# Altium PCB AVR最小系统板.PcbDoc (part 2 of 3)
Units mm, origin at the board's own origin, x right, y up, seen from the top; angles counter-clockwise.
Board outline 152.4 x 101.6 mm, 2 copper layers (Top Layer, Bottom Layer); 29 components, 54 nets, 170 pads, 0 vias.
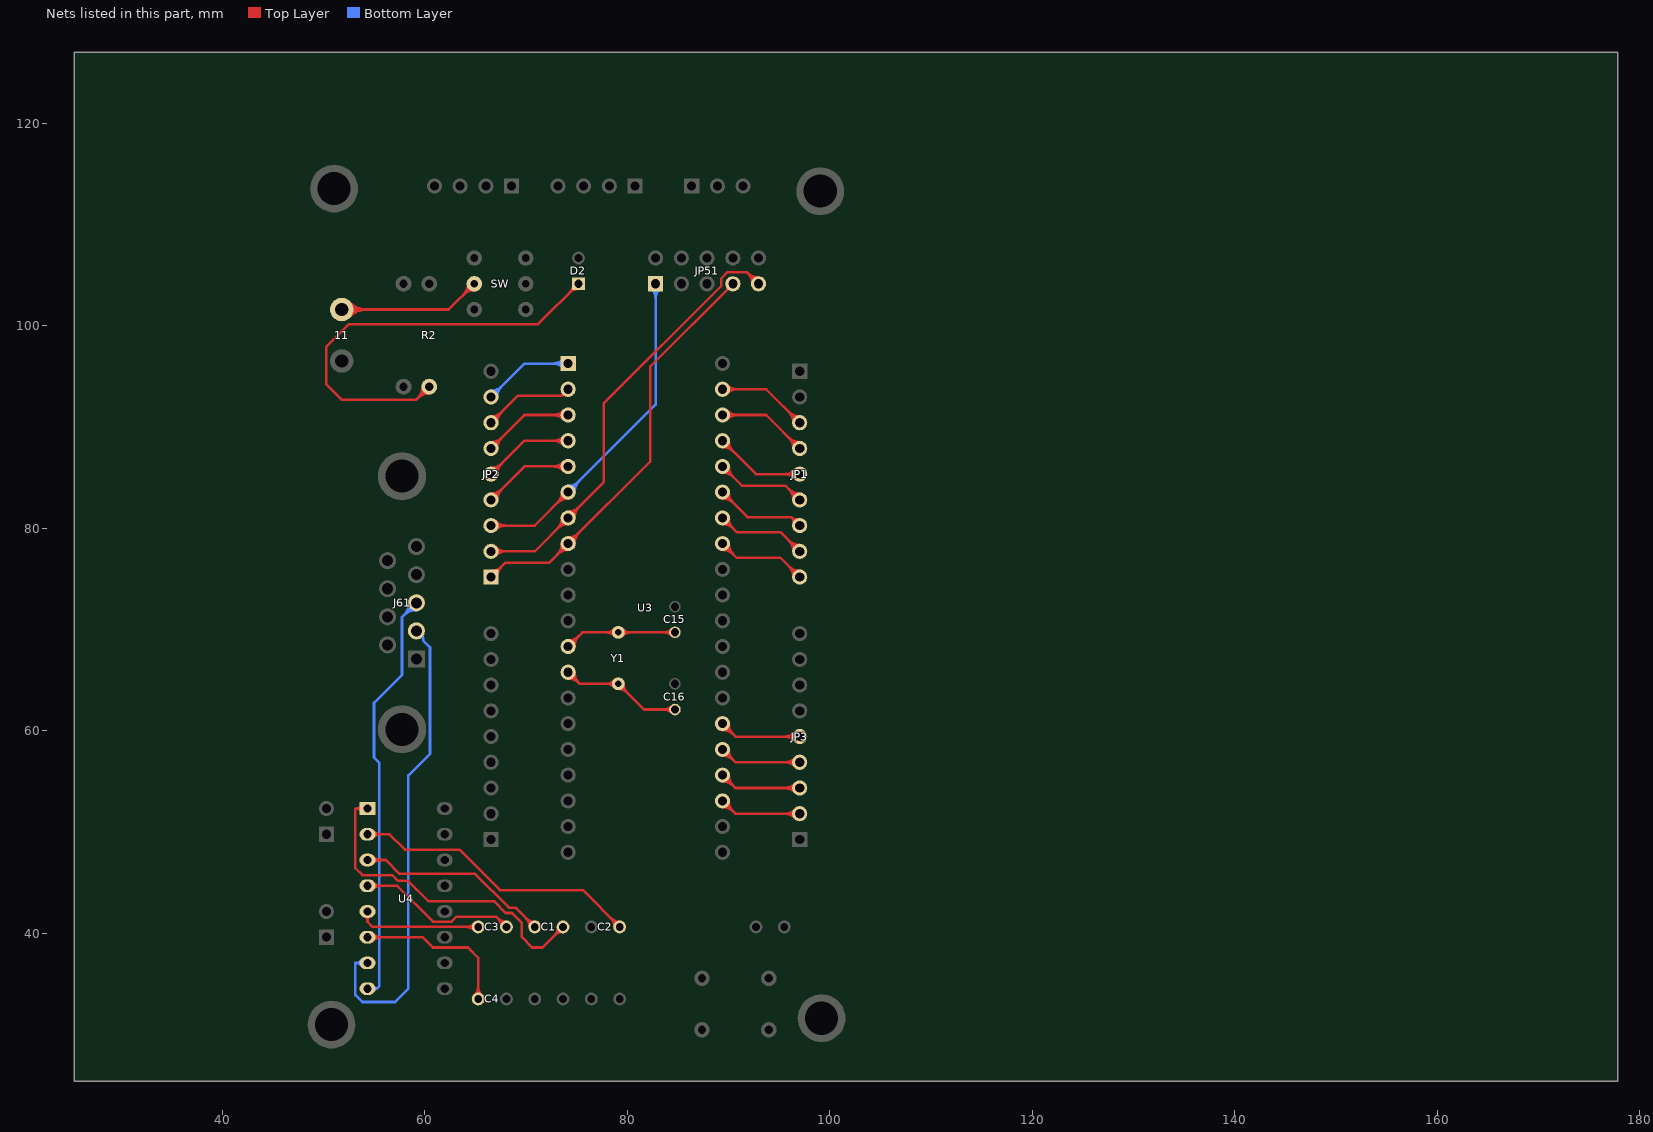
[diagram p2: the nets of this part, all layers, seen from the top]

## Nets (pads, with @x,y where several pads share a name; then routed paths per layer and width w, separated by ;. In a path a pad name is that pad's centre, name@x,y a point inside that pad or via, vN(x,y) a via of type N, cw(c..) or ccw(c..) an arc to the next point about the centre after c; other vN are vias at no path point) (continued)
Net11_1: "11.VCC +5V" SW.1 | length 52.3
  Top Layer w0.254: 51.816,101.6 62.357,101.6 SW.1@64.897,104.14 ; 52.187,101.229 cw(c53.083,100.333) 53.083,101.6 ; 52.187,101.229 cw(c53.083,100.333) 53.083,101.6 ; 52.187,101.229 cw(c53.083,100.333) 53.083,101.6 ; 52.187,101.971 ccw(c53.083,102.867) 53.083,101.6 ; 52.187,101.971 ccw(c53.083,102.867) 53.083,101.6 ; 52.187,101.971 ccw(c53.083,102.867) 53.083,101.6 ; 52.367,101.049 cw(c53.697,99.719) 53.697,101.6 ; 52.367,101.049 cw(c53.697,99.719) 53.697,101.6 ; 52.367,101.049 cw(c53.697,99.719) 53.697,101.6 ; 52.367,102.151 ccw(c53.697,103.481) 53.697,101.6 ; 52.367,102.151 ccw(c53.697,103.481) 53.697,101.6 ; 52.367,102.151 ccw(c53.697,103.481) 53.697,101.6 ; 52.546,100.87 cw(c54.31,99.106) 54.31,101.6 ; 52.546,100.87 cw(c54.31,99.106) 54.31,101.6 ; 52.546,100.87 cw(c54.31,99.106) 54.31,101.6 ; 52.546,102.33 ccw(c54.31,104.094) 54.31,101.6 ; 52.546,102.33 ccw(c54.31,104.094) 54.31,101.6 ; 52.546,102.33 ccw(c54.31,104.094) 54.31,101.6 ; 63.813,103.056 cw(c64.897,101.972) SW.1@64.897,103.505 ; 63.813,103.056 ccw(c62.729,104.14) SW.1@64.262,104.14 ; 63.813,103.056 cw(c64.897,101.972) SW.1@64.897,103.505 ; 63.813,103.056 ccw(c62.729,104.14) SW.1@64.262,104.14 ; 63.813,103.056 cw(c64.897,101.972) SW.1@64.897,103.505 ; 63.813,103.056 ccw(c62.729,104.14) SW.1@64.262,104.14 ; 64.247,103.49 cw(c64.897,102.839) SW.1@64.897,103.759 ; 64.247,103.49 ccw(c63.596,104.14) SW.1@64.516,104.14 ; 64.247,103.49 cw(c64.897,102.839) SW.1@64.897,103.759 ; 64.247,103.49 ccw(c63.596,104.14) SW.1@64.516,104.14 ; 64.247,103.49 cw(c64.897,102.839) SW.1@64.897,103.759 ; 64.247,103.49 ccw(c63.596,104.14) SW.1@64.516,104.14
NetC1_1: C1.1 U4.1 | length 42.7
  Top Layer w0.254: U4.1@54.352,52.323 53.162,52.323 ; C1.1@73.66,40.64 71.628,38.608 70.612,38.608 69.596,39.624 69.596,41.021 68.605,42.012 67.996,42.012 66.827,43.18 60.35,43.18 58.318,45.212 57.328,45.212 56.794,45.745 53.848,45.745 53.162,46.431 53.162,52.323 ; 53.162,52.323 cw(c53.162,51.512) U4.1@53.799,52.014 ; 53.162,52.323 ccw(c53.162,53.134) U4.1@53.799,52.632 ; 53.162,52.323 cw(c53.162,51.512) U4.1@53.799,52.014 ; 53.162,52.323 ccw(c53.162,53.134) U4.1@53.799,52.632 ; 53.162,52.323 cw(c53.162,51.512) U4.1@53.799,52.014 ; 53.162,52.323 ccw(c53.162,53.134) U4.1@53.799,52.632 ; 72.793,39.773 cw(c73.66,38.906) C1.1@73.66,40.132 ; 72.793,39.773 ccw(c71.926,40.64) C1.1@73.152,40.64 ; 72.793,39.773 cw(c73.66,38.906) C1.1@73.66,40.132 ; 72.793,39.773 ccw(c71.926,40.64) C1.1@73.152,40.64 ; 72.793,39.773 cw(c73.66,38.906) C1.1@73.66,40.132 ; 72.793,39.773 ccw(c71.926,40.64) C1.1@73.152,40.64
NetC1_2: C1.2 U4.3 | length 30.7
  Top Layer w0.254: U4.3@54.352,47.243 56.16,47.243 57.531,45.872 64.973,45.872 68.303,42.543 68.963,42.543 C1.2@70.866,40.64 ; U4.3@54.867,46.891 cw(c55.717,46.041) 55.717,47.243 ; U4.3@54.867,46.891 cw(c55.717,46.041) 55.717,47.243 ; U4.3@54.867,46.891 cw(c55.717,46.041) 55.717,47.243 ; U4.3@54.867,47.595 ccw(c55.717,48.445) 55.717,47.243 ; U4.3@54.867,47.595 ccw(c55.717,48.445) 55.717,47.243 ; U4.3@54.867,47.595 ccw(c55.717,48.445) 55.717,47.243 ; 69.999,41.507 cw(c69.132,40.64) C1.2@70.358,40.64 ; 69.999,41.507 ccw(c70.866,42.374) C1.2@70.866,41.148 ; 69.999,41.507 cw(c69.132,40.64) C1.2@70.358,40.64 ; 69.999,41.507 ccw(c70.866,42.374) C1.2@70.866,41.148 ; 69.999,41.507 cw(c69.132,40.64) C1.2@70.358,40.64 ; 69.999,41.507 ccw(c70.866,42.374) C1.2@70.866,41.148
NetC2_1: C2.1 U4.2 | length 40.1
  Top Layer w0.254: U4.2@54.352,49.783 56.516,49.783 58.039,48.26 63.449,48.26 67.437,44.272 75.616,44.272 C2.1@79.248,40.64 ; U4.2@54.867,49.431 cw(c55.717,48.581) 55.717,49.783 ; U4.2@54.867,49.431 cw(c55.717,48.581) 55.717,49.783 ; U4.2@54.867,49.431 cw(c55.717,48.581) 55.717,49.783 ; U4.2@54.867,50.135 ccw(c55.717,50.985) 55.717,49.783 ; U4.2@54.867,50.135 ccw(c55.717,50.985) 55.717,49.783 ; U4.2@54.867,50.135 ccw(c55.717,50.985) 55.717,49.783 ; 78.381,41.507 cw(c77.514,40.64) C2.1@78.74,40.64 ; 78.381,41.507 ccw(c79.248,42.374) C2.1@79.248,41.148 ; 78.381,41.507 cw(c77.514,40.64) C2.1@78.74,40.64 ; 78.381,41.507 ccw(c79.248,42.374) C2.1@79.248,41.148 ; 78.381,41.507 cw(c77.514,40.64) C2.1@78.74,40.64 ; 78.381,41.507 ccw(c79.248,42.374) C2.1@79.248,41.148
NetC3_1: C3.1 U4.4 | length 27.3
  Top Layer w0.254: U4.4@54.352,44.703 57.262,44.703 60.808,41.157 62.645,41.157 63.144,41.656 67.056,41.656 C3.1@68.072,40.64 ; U4.4@54.867,44.351 cw(c55.717,43.501) 55.717,44.703 ; U4.4@54.867,44.351 cw(c55.717,43.501) 55.717,44.703 ; U4.4@54.867,44.351 cw(c55.717,43.501) 55.717,44.703 ; U4.4@54.867,45.055 ccw(c55.717,45.905) 55.717,44.703 ; U4.4@54.867,45.055 ccw(c55.717,45.905) 55.717,44.703 ; U4.4@54.867,45.055 ccw(c55.717,45.905) 55.717,44.703 ; 67.205,41.507 cw(c66.338,40.64) C3.1@67.564,40.64 ; 67.205,41.507 ccw(c68.072,42.374) C3.1@68.072,41.148 ; 67.205,41.507 cw(c66.338,40.64) C3.1@67.564,40.64 ; 67.205,41.507 ccw(c68.072,42.374) C3.1@68.072,41.148 ; 67.205,41.507 cw(c66.338,40.64) C3.1@67.564,40.64 ; 67.205,41.507 ccw(c68.072,42.374) C3.1@68.072,41.148
NetC3_2: C3.2 U4.5 | length 22.2
  Top Layer w0.254: U4.5@54.352,42.163 54.352,41.148 ; C3.2@65.278,40.64 54.86,40.64 54.352,41.148 ; U4.5@54.047,41.769 cw(c53.567,41.148) 54.352,41.148 ; U4.5@54.047,41.769 cw(c53.567,41.148) 54.352,41.148 ; U4.5@54.047,41.769 cw(c53.567,41.148) 54.352,41.148 ; 54.352,41.148 cw(c55.138,41.148) U4.5@54.657,41.769 ; 54.352,41.148 cw(c55.138,41.148) U4.5@54.657,41.769 ; 54.352,41.148 cw(c55.138,41.148) U4.5@54.657,41.769 ; 64.052,40.64 cw(c64.052,39.414) C3.2@64.919,40.281 ; 64.052,40.64 ccw(c64.052,41.866) C3.2@64.919,40.999 ; 64.052,40.64 cw(c64.052,39.414) C3.2@64.919,40.281 ; 64.052,40.64 ccw(c64.052,41.866) C3.2@64.919,40.999 ; 64.052,40.64 cw(c64.052,39.414) C3.2@64.919,40.281 ; 64.052,40.64 ccw(c64.052,41.866) C3.2@64.919,40.999
NetC4_2: C4.2 U4.6 | length 27.3
  Top Layer w0.254: U4.6@54.352,39.623 59.793,39.623 60.808,38.608 64.262,38.608 65.278,37.592 C4.2@65.278,33.528 ; U4.6@54.867,39.271 cw(c55.717,38.421) 55.717,39.623 ; U4.6@54.867,39.271 cw(c55.717,38.421) 55.717,39.623 ; U4.6@54.867,39.271 cw(c55.717,38.421) 55.717,39.623 ; U4.6@54.867,39.975 ccw(c55.717,40.825) 55.717,39.623 ; U4.6@54.867,39.975 ccw(c55.717,40.825) 55.717,39.623 ; U4.6@54.867,39.975 ccw(c55.717,40.825) 55.717,39.623 ; C4.2@64.919,33.887 ccw(c64.052,34.754) 65.278,34.754 ; C4.2@64.919,33.887 ccw(c64.052,34.754) 65.278,34.754 ; C4.2@64.919,33.887 ccw(c64.052,34.754) 65.278,34.754 ; 65.278,34.754 ccw(c66.504,34.754) C4.2@65.637,33.887 ; 65.278,34.754 ccw(c66.504,34.754) C4.2@65.637,33.887 ; 65.278,34.754 ccw(c66.504,34.754) C4.2@65.637,33.887
NetC15_1: C15.1 U3.12 Y1.1 | length 39
  Top Layer w0.254: U3.12@74.168,68.326 75.565,69.723 Y1.1@79.121,69.723 C15.1@84.709,69.723 ; U3.12@74.168,68.695 ccw(c74.168,69.586) 74.798,68.956 ; U3.12@74.168,68.695 ccw(c74.168,69.586) 74.798,68.956 ; U3.12@74.168,68.695 ccw(c74.168,69.586) 74.798,68.956 ; U3.12@74.168,68.949 ccw(c74.168,70.453) 75.232,69.39 ; U3.12@74.168,68.949 ccw(c74.168,70.453) 75.232,69.39 ; U3.12@74.168,68.949 ccw(c74.168,70.453) 75.232,69.39 ; U3.12@74.537,68.326 cw(c75.428,68.326) 74.798,68.956 ; U3.12@74.537,68.326 cw(c75.428,68.326) 74.798,68.956 ; U3.12@74.537,68.326 cw(c75.428,68.326) 74.798,68.956 ; U3.12@74.791,68.326 cw(c76.295,68.326) 75.232,69.39 ; U3.12@74.791,68.326 cw(c76.295,68.326) 75.232,69.39 ; U3.12@74.791,68.326 cw(c76.295,68.326) 75.232,69.39 ; 77.895,69.723 cw(c77.895,68.497) Y1.1@78.762,69.364 ; 77.895,69.723 ccw(c77.895,70.949) Y1.1@78.762,70.082 ; 77.895,69.723 cw(c77.895,68.497) Y1.1@78.762,69.364 ; 77.895,69.723 ccw(c77.895,70.949) Y1.1@78.762,70.082 ; 77.895,69.723 cw(c77.895,68.497) Y1.1@78.762,69.364 ; 77.895,69.723 ccw(c77.895,70.949) Y1.1@78.762,70.082 ; Y1.1@79.48,69.364 cw(c80.347,68.497) 80.347,69.723 ; Y1.1@79.48,69.364 cw(c80.347,68.497) 80.347,69.723 ; Y1.1@79.48,69.364 cw(c80.347,68.497) 80.347,69.723 ; Y1.1@79.48,70.082 ccw(c80.347,70.949) 80.347,69.723 ; Y1.1@79.48,70.082 ccw(c80.347,70.949) 80.347,69.723 ; Y1.1@79.48,70.082 ccw(c80.347,70.949) 80.347,69.723 ; 83.636,69.723 cw(c83.636,68.65) C15.1@84.395,69.409 ; 83.636,69.723 ccw(c83.636,70.796) C15.1@84.395,70.037 ; 83.636,69.723 cw(c83.636,68.65) C15.1@84.395,69.409 ; 83.636,69.723 ccw(c83.636,70.796) C15.1@84.395,70.037 ; 83.636,69.723 cw(c83.636,68.65) C15.1@84.395,69.409 ; 83.636,69.723 ccw(c83.636,70.796) C15.1@84.395,70.037
NetC16_1: C16.1 U3.13 Y1.2 | length 40
  Top Layer w0.254: U3.13@74.168,65.786 75.311,64.643 Y1.2@79.121,64.643 81.661,62.103 C16.1@84.709,62.103 ; U3.13@74.168,65.163 cw(c74.168,63.659) 75.232,64.722 ; U3.13@74.168,65.163 cw(c74.168,63.659) 75.232,64.722 ; U3.13@74.168,65.163 cw(c74.168,63.659) 75.232,64.722 ; U3.13@74.168,65.417 cw(c74.168,64.526) 74.798,65.156 ; U3.13@74.168,65.417 cw(c74.168,64.526) 74.798,65.156 ; U3.13@74.168,65.417 cw(c74.168,64.526) 74.798,65.156 ; U3.13@74.537,65.786 ccw(c75.428,65.786) 74.798,65.156 ; U3.13@74.537,65.786 ccw(c75.428,65.786) 74.798,65.156 ; U3.13@74.537,65.786 ccw(c75.428,65.786) 74.798,65.156 ; U3.13@74.791,65.786 ccw(c76.295,65.786) 75.232,64.722 ; U3.13@74.791,65.786 ccw(c76.295,65.786) 75.232,64.722 ; U3.13@74.791,65.786 ccw(c76.295,65.786) 75.232,64.722 ; 77.895,64.643 cw(c77.895,63.417) Y1.2@78.762,64.284 ; 77.895,64.643 ccw(c77.895,65.869) Y1.2@78.762,65.002 ; 77.895,64.643 cw(c77.895,63.417) Y1.2@78.762,64.284 ; 77.895,64.643 ccw(c77.895,65.869) Y1.2@78.762,65.002 ; 77.895,64.643 cw(c77.895,63.417) Y1.2@78.762,64.284 ; 77.895,64.643 ccw(c77.895,65.869) Y1.2@78.762,65.002 ; Y1.2@79.121,64.135 cw(c79.121,62.909) 79.988,63.776 ; Y1.2@79.121,64.135 cw(c79.121,62.909) 79.988,63.776 ; Y1.2@79.121,64.135 cw(c79.121,62.909) 79.988,63.776 ; Y1.2@79.629,64.643 ccw(c80.855,64.643) 79.988,63.776 ; Y1.2@79.629,64.643 ccw(c80.855,64.643) 79.988,63.776 ; Y1.2@79.629,64.643 ccw(c80.855,64.643) 79.988,63.776 ; 83.636,62.103 cw(c83.636,61.03) C16.1@84.395,61.789 ; 83.636,62.103 ccw(c83.636,63.176) C16.1@84.395,62.417 ; 83.636,62.103 cw(c83.636,61.03) C16.1@84.395,61.789 ; 83.636,62.103 ccw(c83.636,63.176) C16.1@84.395,62.417 ; 83.636,62.103 cw(c83.636,61.03) C16.1@84.395,61.789 ; 83.636,62.103 ccw(c83.636,63.176) C16.1@84.395,62.417
NetD2_1: D2.1 R2.2 | length 60.4
  Top Layer w0.254: R2.2@60.451,93.984 59.152,92.685 51.816,92.685 50.267,94.234 50.267,97.892 52.527,100.152 71.196,100.152 D2.1@75.184,104.14 ; 59.324,92.856 cw(c60.451,91.729) R2.2@60.451,93.323 ; 59.324,92.856 ccw(c58.196,93.984) R2.2@59.791,93.984 ; 59.324,92.856 cw(c60.451,91.729) R2.2@60.451,93.323 ; 59.324,92.856 ccw(c58.196,93.984) R2.2@59.791,93.984 ; 59.324,92.856 cw(c60.451,91.729) R2.2@60.451,93.323 ; 59.324,92.856 ccw(c58.196,93.984) R2.2@59.791,93.984 ; 59.757,93.29 cw(c60.451,92.596) R2.2@60.451,93.577 ; 59.757,93.29 ccw(c59.063,93.984) R2.2@60.045,93.984 ; 59.757,93.29 cw(c60.451,92.596) R2.2@60.451,93.577 ; 59.757,93.29 ccw(c59.063,93.984) R2.2@60.045,93.984 ; 59.757,93.29 cw(c60.451,92.596) R2.2@60.451,93.577 ; 59.757,93.29 ccw(c59.063,93.984) R2.2@60.045,93.984 ; 74.317,103.273 cw(c75.184,102.406) D2.1@75.184,103.632 ; 74.317,103.273 ccw(c73.45,104.14) D2.1@74.676,104.14 ; 74.317,103.273 cw(c75.184,102.406) D2.1@75.184,103.632 ; 74.317,103.273 ccw(c73.45,104.14) D2.1@74.676,104.14 ; 74.317,103.273 cw(c75.184,102.406) D2.1@75.184,103.632 ; 74.317,103.273 ccw(c73.45,104.14) D2.1@74.676,104.14
NetJ61_2: J61.2 U4.7 | length 53.6
  Bottom Layer w0.254: U4.7@54.352,37.083 53.162,37.083 ; J61.2@59.18,69.874 59.842,69.212 ; 53.162,37.083 cw(c53.162,36.272) U4.7@53.799,36.774 ; 53.162,37.083 ccw(c53.162,37.894) U4.7@53.799,37.392 ; 53.162,37.083 cw(c53.162,36.272) U4.7@53.799,36.774 ; 53.162,37.083 ccw(c53.162,37.894) U4.7@53.799,37.392 ; 53.162,37.083 cw(c53.162,36.272) U4.7@53.799,36.774 ; 53.162,37.083 ccw(c53.162,37.894) U4.7@53.799,37.392 ; 53.162,37.083 53.162,33.909 53.848,33.223 57.074,33.223 58.395,34.544 58.395,55.601 60.521,57.727 60.521,68.236 59.842,68.915 59.842,69.212 ; J61.2@59.538,69.252 cw(c59.664,69.033) 59.842,69.212 ; J61.2@59.538,69.252 cw(c59.664,69.033) 59.842,69.212 ; J61.2@59.538,69.252 cw(c59.664,69.033) 59.842,69.212 ; J61.2@59.802,69.516 ccw(c60.021,69.39) 59.842,69.212 ; J61.2@59.802,69.516 ccw(c60.021,69.39) 59.842,69.212 ; J61.2@59.802,69.516 ccw(c60.021,69.39) 59.842,69.212
NetJ61_3: J61.3 U4.8 | length 56.8
  Bottom Layer w0.254: U4.8@54.352,34.543 55.269,34.543 ; J61.3@59.18,72.644 57.76,71.224 57.76,65.532 54.991,62.763 54.991,57.379 55.524,56.845 55.524,34.798 55.269,34.543 ; U4.8@54.972,34.347 cw(c55.269,34.22) 55.269,34.543 ; U4.8@54.972,34.347 cw(c55.269,34.22) 55.269,34.543 ; U4.8@54.972,34.347 cw(c55.269,34.22) 55.269,34.543 ; U4.8@54.972,34.739 ccw(c55.269,34.866) 55.269,34.543 ; U4.8@54.972,34.739 ccw(c55.269,34.866) 55.269,34.543 ; U4.8@54.972,34.739 ccw(c55.269,34.866) 55.269,34.543 ; 57.954,71.418 cw(c59.18,70.193) J61.3@59.18,71.926 ; 57.954,71.418 ccw(c56.729,72.644) J61.3@58.462,72.644 ; 57.954,71.418 cw(c59.18,70.193) J61.3@59.18,71.926 ; 57.954,71.418 ccw(c56.729,72.644) J61.3@58.462,72.644 ; 57.954,71.418 cw(c59.18,70.193) J61.3@59.18,71.926 ; 57.954,71.418 ccw(c56.729,72.644) J61.3@58.462,72.644 ; 58.388,71.852 cw(c59.18,71.06) J61.3@59.18,72.18 ; 58.388,71.852 ccw(c57.596,72.644) J61.3@58.716,72.644 ; 58.388,71.852 cw(c59.18,71.06) J61.3@59.18,72.18 ; 58.388,71.852 ccw(c57.596,72.644) J61.3@58.716,72.644 ; 58.388,71.852 cw(c59.18,71.06) J61.3@59.18,72.18 ; 58.388,71.852 ccw(c57.596,72.644) J61.3@58.716,72.644
NetJP1_3: JP1.3 U3.39 | length 31.6
  Top Layer w0.254: U3.39@89.408,93.726 93.726,93.726 JP1.3@97.028,90.424 ; U3.39@89.669,93.465 cw(c90.299,92.835) 90.299,93.726 ; U3.39@89.669,93.465 cw(c90.299,92.835) 90.299,93.726 ; U3.39@89.669,93.465 cw(c90.299,92.835) 90.299,93.726 ; U3.39@89.669,93.987 ccw(c90.299,94.617) 90.299,93.726 ; U3.39@89.669,93.987 ccw(c90.299,94.617) 90.299,93.726 ; U3.39@89.669,93.987 ccw(c90.299,94.617) 90.299,93.726 ; U3.39@89.849,93.285 cw(c90.912,92.222) 90.912,93.726 ; U3.39@89.849,93.285 cw(c90.912,92.222) 90.912,93.726 ; U3.39@89.849,93.285 cw(c90.912,92.222) 90.912,93.726 ; U3.39@89.849,94.167 ccw(c90.912,95.23) 90.912,93.726 ; U3.39@89.849,94.167 ccw(c90.912,95.23) 90.912,93.726 ; U3.39@89.849,94.167 ccw(c90.912,95.23) 90.912,93.726 ; 95.964,91.488 cw(c94.901,90.424) JP1.3@96.405,90.424 ; 95.964,91.488 ccw(c97.028,92.551) JP1.3@97.028,91.047 ; 95.964,91.488 cw(c94.901,90.424) JP1.3@96.405,90.424 ; 95.964,91.488 ccw(c97.028,92.551) JP1.3@97.028,91.047 ; 95.964,91.488 cw(c94.901,90.424) JP1.3@96.405,90.424 ; 95.964,91.488 ccw(c97.028,92.551) JP1.3@97.028,91.047 ; 96.398,91.054 cw(c95.768,90.424) JP1.3@96.659,90.424 ; 96.398,91.054 ccw(c97.028,91.684) JP1.3@97.028,90.793 ; 96.398,91.054 cw(c95.768,90.424) JP1.3@96.659,90.424 ; 96.398,91.054 ccw(c97.028,91.684) JP1.3@97.028,90.793 ; 96.398,91.054 cw(c95.768,90.424) JP1.3@96.659,90.424 ; 96.398,91.054 ccw(c97.028,91.684) JP1.3@97.028,90.793
NetJP1_4: JP1.4 U3.38 | length 31.6
  Top Layer w0.254: U3.38@89.408,91.186 93.726,91.186 JP1.4@97.028,87.884 ; U3.38@89.669,90.925 cw(c90.299,90.295) 90.299,91.186 ; U3.38@89.669,90.925 cw(c90.299,90.295) 90.299,91.186 ; U3.38@89.669,90.925 cw(c90.299,90.295) 90.299,91.186 ; U3.38@89.669,91.447 ccw(c90.299,92.077) 90.299,91.186 ; U3.38@89.669,91.447 ccw(c90.299,92.077) 90.299,91.186 ; U3.38@89.669,91.447 ccw(c90.299,92.077) 90.299,91.186 ; U3.38@89.849,90.745 cw(c90.912,89.682) 90.912,91.186 ; U3.38@89.849,90.745 cw(c90.912,89.682) 90.912,91.186 ; U3.38@89.849,90.745 cw(c90.912,89.682) 90.912,91.186 ; U3.38@89.849,91.627 ccw(c90.912,92.69) 90.912,91.186 ; U3.38@89.849,91.627 ccw(c90.912,92.69) 90.912,91.186 ; U3.38@89.849,91.627 ccw(c90.912,92.69) 90.912,91.186 ; 95.964,88.948 cw(c94.901,87.884) JP1.4@96.405,87.884 ; 95.964,88.948 ccw(c97.028,90.011) JP1.4@97.028,88.507 ; 95.964,88.948 cw(c94.901,87.884) JP1.4@96.405,87.884 ; 95.964,88.948 ccw(c97.028,90.011) JP1.4@97.028,88.507 ; 95.964,88.948 cw(c94.901,87.884) JP1.4@96.405,87.884 ; 95.964,88.948 ccw(c97.028,90.011) JP1.4@97.028,88.507 ; 96.398,88.514 cw(c95.768,87.884) JP1.4@96.659,87.884 ; 96.398,88.514 ccw(c97.028,89.144) JP1.4@97.028,88.253 ; 96.398,88.514 cw(c95.768,87.884) JP1.4@96.659,87.884 ; 96.398,88.514 ccw(c97.028,89.144) JP1.4@97.028,88.253 ; 96.398,88.514 cw(c95.768,87.884) JP1.4@96.659,87.884 ; 96.398,88.514 ccw(c97.028,89.144) JP1.4@97.028,88.253
NetJP1_5: JP1.5 U3.37 | length 31.6
  Top Layer w0.254: U3.37@89.408,88.646 92.71,85.344 JP1.5@97.028,85.344 ; U3.37@89.408,88.023 cw(c89.408,86.519) 90.472,87.582 ; U3.37@89.408,88.023 cw(c89.408,86.519) 90.472,87.582 ; U3.37@89.408,88.023 cw(c89.408,86.519) 90.472,87.582 ; U3.37@89.408,88.277 cw(c89.408,87.386) 90.038,88.016 ; U3.37@89.408,88.277 cw(c89.408,87.386) 90.038,88.016 ; U3.37@89.408,88.277 cw(c89.408,87.386) 90.038,88.016 ; U3.37@89.777,88.646 ccw(c90.668,88.646) 90.038,88.016 ; U3.37@89.777,88.646 ccw(c90.668,88.646) 90.038,88.016 ; U3.37@89.777,88.646 ccw(c90.668,88.646) 90.038,88.016 ; U3.37@90.031,88.646 ccw(c91.535,88.646) 90.472,87.582 ; U3.37@90.031,88.646 ccw(c91.535,88.646) 90.472,87.582 ; U3.37@90.031,88.646 ccw(c91.535,88.646) 90.472,87.582 ; 95.524,85.344 cw(c95.524,83.84) JP1.5@96.587,84.903 ; 95.524,85.344 ccw(c95.524,86.848) JP1.5@96.587,85.785 ; 95.524,85.344 cw(c95.524,83.84) JP1.5@96.587,84.903 ; 95.524,85.344 ccw(c95.524,86.848) JP1.5@96.587,85.785 ; 95.524,85.344 cw(c95.524,83.84) JP1.5@96.587,84.903 ; 95.524,85.344 ccw(c95.524,86.848) JP1.5@96.587,85.785 ; 96.137,85.344 cw(c96.137,84.453) JP1.5@96.767,85.083 ; 96.137,85.344 ccw(c96.137,86.235) JP1.5@96.767,85.605 ; 96.137,85.344 cw(c96.137,84.453) JP1.5@96.767,85.083 ; 96.137,85.344 ccw(c96.137,86.235) JP1.5@96.767,85.605 ; 96.137,85.344 cw(c96.137,84.453) JP1.5@96.767,85.083 ; 96.137,85.344 ccw(c96.137,86.235) JP1.5@96.767,85.605
NetJP1_6: JP1.6 U3.36 | length 31.6
  Top Layer w0.254: U3.36@89.408,86.106 91.313,84.201 95.631,84.201 JP1.6@97.028,82.804 ; U3.36@89.408,85.483 cw(c89.408,83.979) 90.472,85.042 ; U3.36@89.408,85.483 cw(c89.408,83.979) 90.472,85.042 ; U3.36@89.408,85.483 cw(c89.408,83.979) 90.472,85.042 ; U3.36@89.408,85.737 cw(c89.408,84.846) 90.038,85.476 ; U3.36@89.408,85.737 cw(c89.408,84.846) 90.038,85.476 ; U3.36@89.408,85.737 cw(c89.408,84.846) 90.038,85.476 ; U3.36@89.777,86.106 ccw(c90.668,86.106) 90.038,85.476 ; U3.36@89.777,86.106 ccw(c90.668,86.106) 90.038,85.476 ; U3.36@89.777,86.106 ccw(c90.668,86.106) 90.038,85.476 ; U3.36@90.031,86.106 ccw(c91.535,86.106) 90.472,85.042 ; U3.36@90.031,86.106 ccw(c91.535,86.106) 90.472,85.042 ; U3.36@90.031,86.106 ccw(c91.535,86.106) 90.472,85.042 ; 95.964,83.868 cw(c94.901,82.804) JP1.6@96.405,82.804 ; 95.964,83.868 ccw(c97.028,84.931) JP1.6@97.028,83.427 ; 95.964,83.868 cw(c94.901,82.804) JP1.6@96.405,82.804 ; 95.964,83.868 ccw(c97.028,84.931) JP1.6@97.028,83.427 ; 95.964,83.868 cw(c94.901,82.804) JP1.6@96.405,82.804 ; 95.964,83.868 ccw(c97.028,84.931) JP1.6@97.028,83.427 ; 96.398,83.434 cw(c95.768,82.804) JP1.6@96.659,82.804 ; 96.398,83.434 ccw(c97.028,84.064) JP1.6@97.028,83.173 ; 96.398,83.434 cw(c95.768,82.804) JP1.6@96.659,82.804 ; 96.398,83.434 ccw(c97.028,84.064) JP1.6@97.028,83.173 ; 96.398,83.434 cw(c95.768,82.804) JP1.6@96.659,82.804 ; 96.398,83.434 ccw(c97.028,84.064) JP1.6@97.028,83.173
NetJP1_7: JP1.7 U3.35 | length 25
  Top Layer w0.254: U3.35@89.408,83.566 91.872,81.102 96.19,81.102 ; JP1.7@97.028,80.264 96.19,81.102 ; U3.35@89.408,82.943 cw(c89.408,81.439) 90.472,82.502 ; U3.35@89.408,82.943 cw(c89.408,81.439) 90.472,82.502 ; U3.35@89.408,82.943 cw(c89.408,81.439) 90.472,82.502 ; U3.35@89.408,83.197 cw(c89.408,82.306) 90.038,82.936 ; U3.35@89.408,83.197 cw(c89.408,82.306) 90.038,82.936 ; U3.35@89.408,83.197 cw(c89.408,82.306) 90.038,82.936 ; U3.35@89.777,83.566 ccw(c90.668,83.566) 90.038,82.936 ; U3.35@89.777,83.566 ccw(c90.668,83.566) 90.038,82.936 ; U3.35@89.777,83.566 ccw(c90.668,83.566) 90.038,82.936 ; U3.35@90.031,83.566 ccw(c91.535,83.566) 90.472,82.502 ; U3.35@90.031,83.566 ccw(c91.535,83.566) 90.472,82.502 ; U3.35@90.031,83.566 ccw(c91.535,83.566) 90.472,82.502 ; 96.19,81.102 cw(c95.613,80.525) JP1.7@96.415,80.377 ; 96.19,81.102 ccw(c96.767,81.679) JP1.7@96.915,80.877 ; 96.19,81.102 cw(c95.613,80.525) JP1.7@96.415,80.377 ; 96.19,81.102 ccw(c96.767,81.679) JP1.7@96.915,80.877 ; 96.19,81.102 cw(c95.613,80.525) JP1.7@96.415,80.377 ; 96.19,81.102 ccw(c96.767,81.679) JP1.7@96.915,80.877
NetJP1_8: JP1.8 U3.34 | length 31.6
  Top Layer w0.254: U3.34@89.408,81.026 90.805,79.629 95.123,79.629 JP1.8@97.028,77.724 ; U3.34@89.408,80.403 cw(c89.408,78.899) 90.472,79.962 ; U3.34@89.408,80.403 cw(c89.408,78.899) 90.472,79.962 ; U3.34@89.408,80.403 cw(c89.408,78.899) 90.472,79.962 ; U3.34@89.408,80.657 cw(c89.408,79.766) 90.038,80.396 ; U3.34@89.408,80.657 cw(c89.408,79.766) 90.038,80.396 ; U3.34@89.408,80.657 cw(c89.408,79.766) 90.038,80.396 ; U3.34@89.777,81.026 ccw(c90.668,81.026) 90.038,80.396 ; U3.34@89.777,81.026 ccw(c90.668,81.026) 90.038,80.396 ; U3.34@89.777,81.026 ccw(c90.668,81.026) 90.038,80.396 ; U3.34@90.031,81.026 ccw(c91.535,81.026) 90.472,79.962 ; U3.34@90.031,81.026 ccw(c91.535,81.026) 90.472,79.962 ; U3.34@90.031,81.026 ccw(c91.535,81.026) 90.472,79.962 ; 95.964,78.788 cw(c94.901,77.724) JP1.8@96.405,77.724 ; 95.964,78.788 ccw(c97.028,79.851) JP1.8@97.028,78.347 ; 95.964,78.788 cw(c94.901,77.724) JP1.8@96.405,77.724 ; 95.964,78.788 ccw(c97.028,79.851) JP1.8@97.028,78.347 ; 95.964,78.788 cw(c94.901,77.724) JP1.8@96.405,77.724 ; 95.964,78.788 ccw(c97.028,79.851) JP1.8@97.028,78.347 ; 96.398,78.354 cw(c95.768,77.724) JP1.8@96.659,77.724 ; 96.398,78.354 ccw(c97.028,78.984) JP1.8@97.028,78.093 ; 96.398,78.354 cw(c95.768,77.724) JP1.8@96.659,77.724 ; 96.398,78.354 ccw(c97.028,78.984) JP1.8@97.028,78.093 ; 96.398,78.354 cw(c95.768,77.724) JP1.8@96.659,77.724 ; 96.398,78.354 ccw(c97.028,78.984) JP1.8@97.028,78.093
NetJP1_9: JP1.9 U3.33 | length 31.6
  Top Layer w0.254: U3.33@89.408,78.486 90.805,77.089 95.123,77.089 JP1.9@97.028,75.184 ; U3.33@89.408,77.863 cw(c89.408,76.359) 90.472,77.422 ; U3.33@89.408,77.863 cw(c89.408,76.359) 90.472,77.422 ; U3.33@89.408,77.863 cw(c89.408,76.359) 90.472,77.422 ; U3.33@89.408,78.117 cw(c89.408,77.226) 90.038,77.856 ; U3.33@89.408,78.117 cw(c89.408,77.226) 90.038,77.856 ; U3.33@89.408,78.117 cw(c89.408,77.226) 90.038,77.856 ; U3.33@89.777,78.486 ccw(c90.668,78.486) 90.038,77.856 ; U3.33@89.777,78.486 ccw(c90.668,78.486) 90.038,77.856 ; U3.33@89.777,78.486 ccw(c90.668,78.486) 90.038,77.856 ; U3.33@90.031,78.486 ccw(c91.535,78.486) 90.472,77.422 ; U3.33@90.031,78.486 ccw(c91.535,78.486) 90.472,77.422 ; U3.33@90.031,78.486 ccw(c91.535,78.486) 90.472,77.422 ; 95.964,76.248 cw(c94.901,75.184) JP1.9@96.405,75.184 ; 95.964,76.248 ccw(c97.028,77.311) JP1.9@97.028,75.807 ; 95.964,76.248 cw(c94.901,75.184) JP1.9@96.405,75.184 ; 95.964,76.248 ccw(c97.028,77.311) JP1.9@97.028,75.807 ; 95.964,76.248 cw(c94.901,75.184) JP1.9@96.405,75.184 ; 95.964,76.248 ccw(c97.028,77.311) JP1.9@97.028,75.807 ; 96.398,75.814 cw(c95.768,75.184) JP1.9@96.659,75.184 ; 96.398,75.814 ccw(c97.028,76.444) JP1.9@97.028,75.553 ; 96.398,75.814 cw(c95.768,75.184) JP1.9@96.659,75.184 ; 96.398,75.814 ccw(c97.028,76.444) JP1.9@97.028,75.553 ; 96.398,75.814 cw(c95.768,75.184) JP1.9@96.659,75.184 ; 96.398,75.814 ccw(c97.028,76.444) JP1.9@97.028,75.553
NetJP2_1: JP2.1 JP51.7 U3.8 | length 75.2
  Top Layer w0.254: JP2.1@66.548,75.184 67.945,76.581 72.263,76.581 U3.8@74.168,78.486 82.271,86.589 82.271,95.987 JP51.7@90.424,104.14 ; JP2.1@66.548,75.553 ccw(c66.548,76.444) JP2.1@67.178,75.814 ; JP2.1@66.548,75.553 ccw(c66.548,76.444) JP2.1@67.178,75.814 ; JP2.1@66.548,75.553 ccw(c66.548,76.444) JP2.1@67.178,75.814 ; JP2.1@66.548,75.807 ccw(c66.548,77.311) 67.612,76.248 ; JP2.1@66.548,75.807 ccw(c66.548,77.311) 67.612,76.248 ; JP2.1@66.548,75.807 ccw(c66.548,77.311) 67.612,76.248 ; JP2.1@66.917,75.184 cw(c67.808,75.184) JP2.1@67.178,75.814 ; JP2.1@66.917,75.184 cw(c67.808,75.184) JP2.1@67.178,75.814 ; JP2.1@66.917,75.184 cw(c67.808,75.184) JP2.1@67.178,75.814 ; JP2.1@67.171,75.184 cw(c68.675,75.184) 67.612,76.248 ; JP2.1@67.171,75.184 cw(c68.675,75.184) 67.612,76.248 ; JP2.1@67.171,75.184 cw(c68.675,75.184) 67.612,76.248 ; 73.104,77.422 cw(c74.168,76.359) U3.8@74.168,77.863 ; 73.104,77.422 ccw(c72.041,78.486) U3.8@73.545,78.486 ; 73.104,77.422 cw(c74.168,76.359) U3.8@74.168,77.863 ; 73.104,77.422 ccw(c72.041,78.486) U3.8@73.545,78.486 ; 73.104,77.422 cw(c74.168,76.359) U3.8@74.168,77.863 ; 73.104,77.422 ccw(c72.041,78.486) U3.8@73.545,78.486 ; 73.538,77.856 cw(c74.168,77.226) U3.8@74.168,78.117 ; 73.538,77.856 ccw(c72.908,78.486) U3.8@73.799,78.486 ; 73.538,77.856 cw(c74.168,77.226) U3.8@74.168,78.117 ; 73.538,77.856 ccw(c72.908,78.486) U3.8@73.799,78.486 ; 73.538,77.856 cw(c74.168,77.226) U3.8@74.168,78.117 ; 73.538,77.856 ccw(c72.908,78.486) U3.8@73.799,78.486 ; U3.8@74.168,78.855 ccw(c74.168,79.746) 74.798,79.116 ; U3.8@74.168,78.855 ccw(c74.168,79.746) 74.798,79.116 ; U3.8@74.168,78.855 ccw(c74.168,79.746) 74.798,79.116 ; U3.8@74.168,79.109 ccw(c74.168,80.613) 75.232,79.55 ; U3.8@74.168,79.109 ccw(c74.168,80.613) 75.232,79.55 ; U3.8@74.168,79.109 ccw(c74.168,80.613) 75.232,79.55 ; U3.8@74.537,78.486 cw(c75.428,78.486) 74.798,79.116 ; U3.8@74.537,78.486 cw(c75.428,78.486) 74.798,79.116 ; U3.8@74.537,78.486 cw(c75.428,78.486) 74.798,79.116 ; U3.8@74.791,78.486 cw(c76.295,78.486) 75.232,79.55 ; U3.8@74.791,78.486 cw(c76.295,78.486) 75.232,79.55 ; U3.8@74.791,78.486 cw(c76.295,78.486) 75.232,79.55
NetJP2_2: JP2.2 JP51.9 U3.7 | length 88.4
  Top Layer w0.254: JP2.2@66.548,77.724 70.866,77.724 U3.7@74.168,81.026 77.673,84.531 77.673,92.314 89.281,103.922 89.281,104.648 89.916,105.283 91.821,105.283 JP51.9@92.964,104.14 ; JP2.2@66.809,77.463 cw(c67.439,76.833) 67.439,77.724 ; JP2.2@66.809,77.463 cw(c67.439,76.833) 67.439,77.724 ; JP2.2@66.809,77.463 cw(c67.439,76.833) 67.439,77.724 ; JP2.2@66.809,77.985 ccw(c67.439,78.615) 67.439,77.724 ; JP2.2@66.809,77.985 ccw(c67.439,78.615) 67.439,77.724 ; JP2.2@66.809,77.985 ccw(c67.439,78.615) 67.439,77.724 ; JP2.2@66.989,77.283 cw(c68.052,76.22) 68.052,77.724 ; JP2.2@66.989,77.283 cw(c68.052,76.22) 68.052,77.724 ; JP2.2@66.989,77.283 cw(c68.052,76.22) 68.052,77.724 ; JP2.2@66.989,78.165 ccw(c68.052,79.228) 68.052,77.724 ; JP2.2@66.989,78.165 ccw(c68.052,79.228) 68.052,77.724 ; JP2.2@66.989,78.165 ccw(c68.052,79.228) 68.052,77.724 ; 73.104,79.962 cw(c74.168,78.899) U3.7@74.168,80.403 ; 73.104,79.962 ccw(c72.041,81.026) U3.7@73.545,81.026 ; 73.104,79.962 cw(c74.168,78.899) U3.7@74.168,80.403 ; 73.104,79.962 ccw(c72.041,81.026) U3.7@73.545,81.026 ; 73.104,79.962 cw(c74.168,78.899) U3.7@74.168,80.403 ; 73.104,79.962 ccw(c72.041,81.026) U3.7@73.545,81.026 ; 73.538,80.396 cw(c74.168,79.766) U3.7@74.168,80.657 ; 73.538,80.396 ccw(c72.908,81.026) U3.7@73.799,81.026 ; 73.538,80.396 cw(c74.168,79.766) U3.7@74.168,80.657 ; 73.538,80.396 ccw(c72.908,81.026) U3.7@73.799,81.026 ; 73.538,80.396 cw(c74.168,79.766) U3.7@74.168,80.657 ; 73.538,80.396 ccw(c72.908,81.026) U3.7@73.799,81.026 ; U3.7@74.168,81.395 ccw(c74.168,82.286) 74.798,81.656 ; U3.7@74.168,81.395 ccw(c74.168,82.286) 74.798,81.656 ; U3.7@74.168,81.395 ccw(c74.168,82.286) 74.798,81.656 ; U3.7@74.168,81.649 ccw(c74.168,83.153) 75.232,82.09 ; U3.7@74.168,81.649 ccw(c74.168,83.153) 75.232,82.09 ; U3.7@74.168,81.649 ccw(c74.168,83.153) 75.232,82.09 ; U3.7@74.537,81.026 cw(c75.428,81.026) 74.798,81.656 ; U3.7@74.537,81.026 cw(c75.428,81.026) 74.798,81.656 ; U3.7@74.537,81.026 cw(c75.428,81.026) 74.798,81.656 ; U3.7@74.791,81.026 cw(c76.295,81.026) 75.232,82.09 ; U3.7@74.791,81.026 cw(c76.295,81.026) 75.232,82.09 ; U3.7@74.791,81.026 cw(c76.295,81.026) 75.232,82.09 ; 91.9,105.204 cw(c90.837,104.14) JP51.9@92.341,104.14 ; 91.9,105.204 ccw(c92.964,106.267) JP51.9@92.964,104.763 ; 91.9,105.204 cw(c90.837,104.14) JP51.9@92.341,104.14 ; 91.9,105.204 ccw(c92.964,106.267) JP51.9@92.964,104.763 ; 91.9,105.204 cw(c90.837,104.14) JP51.9@92.341,104.14 ; 91.9,105.204 ccw(c92.964,106.267) JP51.9@92.964,104.763 ; 92.334,104.77 cw(c91.704,104.14) JP51.9@92.595,104.14 ; 92.334,104.77 ccw(c92.964,105.4) JP51.9@92.964,104.509 ; 92.334,104.77 cw(c91.704,104.14) JP51.9@92.595,104.14 ; 92.334,104.77 ccw(c92.964,105.4) JP51.9@92.964,104.509 ; 92.334,104.77 cw(c91.704,104.14) JP51.9@92.595,104.14 ; 92.334,104.77 ccw(c92.964,105.4) JP51.9@92.964,104.509
NetJP2_3: JP2.3 JP51.1 U3.6 | length 78.3
  Top Layer w0.254: JP2.3@66.548,80.264 70.866,80.264 U3.6@74.168,83.566 ; JP2.3@66.809,80.003 cw(c67.439,79.373) 67.439,80.264 ; JP2.3@66.809,80.003 cw(c67.439,79.373) 67.439,80.264 ; JP2.3@66.809,80.003 cw(c67.439,79.373) 67.439,80.264 ; JP2.3@66.809,80.525 ccw(c67.439,81.155) 67.439,80.264 ; JP2.3@66.809,80.525 ccw(c67.439,81.155) 67.439,80.264 ; JP2.3@66.809,80.525 ccw(c67.439,81.155) 67.439,80.264 ; JP2.3@66.989,79.823 cw(c68.052,78.76) 68.052,80.264 ; JP2.3@66.989,79.823 cw(c68.052,78.76) 68.052,80.264 ; JP2.3@66.989,79.823 cw(c68.052,78.76) 68.052,80.264 ; JP2.3@66.989,80.705 ccw(c68.052,81.768) 68.052,80.264 ; JP2.3@66.989,80.705 ccw(c68.052,81.768) 68.052,80.264 ; JP2.3@66.989,80.705 ccw(c68.052,81.768) 68.052,80.264 ; 73.104,82.502 cw(c74.168,81.439) U3.6@74.168,82.943 ; 73.104,82.502 ccw(c72.041,83.566) U3.6@73.545,83.566 ; 73.104,82.502 cw(c74.168,81.439) U3.6@74.168,82.943 ; 73.104,82.502 ccw(c72.041,83.566) U3.6@73.545,83.566 ; 73.104,82.502 cw(c74.168,81.439) U3.6@74.168,82.943 ; 73.104,82.502 ccw(c72.041,83.566) U3.6@73.545,83.566 ; 73.538,82.936 cw(c74.168,82.306) U3.6@74.168,83.197 ; 73.538,82.936 ccw(c72.908,83.566) U3.6@73.799,83.566 ; 73.538,82.936 cw(c74.168,82.306) U3.6@74.168,83.197 ; 73.538,82.936 ccw(c72.908,83.566) U3.6@73.799,83.566 ; 73.538,82.936 cw(c74.168,82.306) U3.6@74.168,83.197 ; 73.538,82.936 ccw(c72.908,83.566) U3.6@73.799,83.566
  Bottom Layer w0.254: U3.6@74.168,83.566 82.804,92.202 JP51.1@82.804,104.14 ; U3.6@74.168,83.935 ccw(c74.168,84.826) 74.798,84.196 ; U3.6@74.168,83.935 ccw(c74.168,84.826) 74.798,84.196 ; U3.6@74.168,83.935 ccw(c74.168,84.826) 74.798,84.196 ; U3.6@74.168,84.189 ccw(c74.168,85.693) 75.232,84.63 ; U3.6@74.168,84.189 ccw(c74.168,85.693) 75.232,84.63 ; U3.6@74.168,84.189 ccw(c74.168,85.693) 75.232,84.63 ; U3.6@74.537,83.566 cw(c75.428,83.566) 74.798,84.196 ; U3.6@74.537,83.566 cw(c75.428,83.566) 74.798,84.196 ; U3.6@74.537,83.566 cw(c75.428,83.566) 74.798,84.196 ; U3.6@74.791,83.566 cw(c76.295,83.566) 75.232,84.63 ; U3.6@74.791,83.566 cw(c76.295,83.566) 75.232,84.63 ; U3.6@74.791,83.566 cw(c76.295,83.566) 75.232,84.63 ; JP51.1@82.363,103.699 cw(c81.3,102.636) 82.804,102.636 ; JP51.1@82.363,103.699 cw(c81.3,102.636) 82.804,102.636 ; JP51.1@82.363,103.699 cw(c81.3,102.636) 82.804,102.636 ; JP51.1@82.543,103.879 cw(c81.913,103.249) 82.804,103.249 ; JP51.1@82.543,103.879 cw(c81.913,103.249) 82.804,103.249 ; JP51.1@82.543,103.879 cw(c81.913,103.249) 82.804,103.249 ; 82.804,102.636 cw(c84.308,102.636) JP51.1@83.245,103.699 ; 82.804,102.636 cw(c84.308,102.636) JP51.1@83.245,103.699 ; 82.804,102.636 cw(c84.308,102.636) JP51.1@83.245,103.699 ; 82.804,103.249 cw(c83.695,103.249) JP51.1@83.065,103.879 ; 82.804,103.249 cw(c83.695,103.249) JP51.1@83.065,103.879 ; 82.804,103.249 cw(c83.695,103.249) JP51.1@83.065,103.879
NetJP2_4: JP2.4 U3.5 | length 31.6
  Top Layer w0.254: JP2.4@66.548,82.804 69.85,86.106 U3.5@74.168,86.106 ; JP2.4@66.548,83.173 ccw(c66.548,84.064) 67.178,83.434 ; JP2.4@66.548,83.173 ccw(c66.548,84.064) 67.178,83.434 ; JP2.4@66.548,83.173 ccw(c66.548,84.064) 67.178,83.434 ; JP2.4@66.548,83.427 ccw(c66.548,84.931) 67.612,83.868 ; JP2.4@66.548,83.427 ccw(c66.548,84.931) 67.612,83.868 ; JP2.4@66.548,83.427 ccw(c66.548,84.931) 67.612,83.868 ; JP2.4@66.917,82.804 cw(c67.808,82.804) 67.178,83.434 ; JP2.4@66.917,82.804 cw(c67.808,82.804) 67.178,83.434 ; JP2.4@66.917,82.804 cw(c67.808,82.804) 67.178,83.434 ; JP2.4@67.171,82.804 cw(c68.675,82.804) 67.612,83.868 ; JP2.4@67.171,82.804 cw(c68.675,82.804) 67.612,83.868 ; JP2.4@67.171,82.804 cw(c68.675,82.804) 67.612,83.868 ; 72.664,86.106 cw(c72.664,84.602) U3.5@73.727,85.665 ; 72.664,86.106 ccw(c72.664,87.61) U3.5@73.727,86.547 ; 72.664,86.106 cw(c72.664,84.602) U3.5@73.727,85.665 ; 72.664,86.106 ccw(c72.664,87.61) U3.5@73.727,86.547 ; 72.664,86.106 cw(c72.664,84.602) U3.5@73.727,85.665 ; 72.664,86.106 ccw(c72.664,87.61) U3.5@73.727,86.547 ; 73.277,86.106 cw(c73.277,85.215) U3.5@73.907,85.845 ; 73.277,86.106 ccw(c73.277,86.997) U3.5@73.907,86.367 ; 73.277,86.106 cw(c73.277,85.215) U3.5@73.907,85.845 ; 73.277,86.106 ccw(c73.277,86.997) U3.5@73.907,86.367 ; 73.277,86.106 cw(c73.277,85.215) U3.5@73.907,85.845 ; 73.277,86.106 ccw(c73.277,86.997) U3.5@73.907,86.367
NetJP2_5: JP2.5 U3.4 | length 31.6
  Top Layer w0.254: JP2.5@66.548,85.344 69.85,88.646 U3.4@74.168,88.646 ; JP2.5@66.548,85.713 ccw(c66.548,86.604) 67.178,85.974 ; JP2.5@66.548,85.713 ccw(c66.548,86.604) 67.178,85.974 ; JP2.5@66.548,85.713 ccw(c66.548,86.604) 67.178,85.974 ; JP2.5@66.548,85.967 ccw(c66.548,87.471) 67.612,86.408 ; JP2.5@66.548,85.967 ccw(c66.548,87.471) 67.612,86.408 ; JP2.5@66.548,85.967 ccw(c66.548,87.471) 67.612,86.408 ; JP2.5@66.917,85.344 cw(c67.808,85.344) 67.178,85.974 ; JP2.5@66.917,85.344 cw(c67.808,85.344) 67.178,85.974 ; JP2.5@66.917,85.344 cw(c67.808,85.344) 67.178,85.974 ; JP2.5@67.171,85.344 cw(c68.675,85.344) 67.612,86.408 ; JP2.5@67.171,85.344 cw(c68.675,85.344) 67.612,86.408 ; JP2.5@67.171,85.344 cw(c68.675,85.344) 67.612,86.408 ; 72.664,88.646 cw(c72.664,87.142) U3.4@73.727,88.205 ; 72.664,88.646 ccw(c72.664,90.15) U3.4@73.727,89.087 ; 72.664,88.646 cw(c72.664,87.142) U3.4@73.727,88.205 ; 72.664,88.646 ccw(c72.664,90.15) U3.4@73.727,89.087 ; 72.664,88.646 cw(c72.664,87.142) U3.4@73.727,88.205 ; 72.664,88.646 ccw(c72.664,90.15) U3.4@73.727,89.087 ; 73.277,88.646 cw(c73.277,87.755) U3.4@73.907,88.385 ; 73.277,88.646 ccw(c73.277,89.537) U3.4@73.907,88.907 ; 73.277,88.646 cw(c73.277,87.755) U3.4@73.907,88.385 ; 73.277,88.646 ccw(c73.277,89.537) U3.4@73.907,88.907 ; 73.277,88.646 cw(c73.277,87.755) U3.4@73.907,88.385 ; 73.277,88.646 ccw(c73.277,89.537) U3.4@73.907,88.907
NetJP2_6: JP2.6 U3.3 | length 31.6
  Top Layer w0.254: JP2.6@66.548,87.884 69.85,91.186 U3.3@74.168,91.186 ; JP2.6@66.548,88.253 ccw(c66.548,89.144) 67.178,88.514 ; JP2.6@66.548,88.253 ccw(c66.548,89.144) 67.178,88.514 ; JP2.6@66.548,88.253 ccw(c66.548,89.144) 67.178,88.514 ; JP2.6@66.548,88.507 ccw(c66.548,90.011) 67.612,88.948 ; JP2.6@66.548,88.507 ccw(c66.548,90.011) 67.612,88.948 ; JP2.6@66.548,88.507 ccw(c66.548,90.011) 67.612,88.948 ; JP2.6@66.917,87.884 cw(c67.808,87.884) 67.178,88.514 ; JP2.6@66.917,87.884 cw(c67.808,87.884) 67.178,88.514 ; JP2.6@66.917,87.884 cw(c67.808,87.884) 67.178,88.514 ; JP2.6@67.171,87.884 cw(c68.675,87.884) 67.612,88.948 ; JP2.6@67.171,87.884 cw(c68.675,87.884) 67.612,88.948 ; JP2.6@67.171,87.884 cw(c68.675,87.884) 67.612,88.948 ; 72.664,91.186 cw(c72.664,89.682) U3.3@73.727,90.745 ; 72.664,91.186 ccw(c72.664,92.69) U3.3@73.727,91.627 ; 72.664,91.186 cw(c72.664,89.682) U3.3@73.727,90.745 ; 72.664,91.186 ccw(c72.664,92.69) U3.3@73.727,91.627 ; 72.664,91.186 cw(c72.664,89.682) U3.3@73.727,90.745 ; 72.664,91.186 ccw(c72.664,92.69) U3.3@73.727,91.627 ; 73.277,91.186 cw(c73.277,90.295) U3.3@73.907,90.925 ; 73.277,91.186 ccw(c73.277,92.077) U3.3@73.907,91.447 ; 73.277,91.186 cw(c73.277,90.295) U3.3@73.907,90.925 ; 73.277,91.186 ccw(c73.277,92.077) U3.3@73.907,91.447 ; 73.277,91.186 cw(c73.277,90.295) U3.3@73.907,90.925 ; 73.277,91.186 ccw(c73.277,92.077) U3.3@73.907,91.447
NetJP2_7: JP2.7 U3.2 | length 22.7
  Top Layer w0.254: JP2.7@66.548,90.424 69.215,93.091 73.533,93.091 ; U3.2@74.168,93.726 73.533,93.091 ; JP2.7@66.548,90.793 ccw(c66.548,91.684) 67.178,91.054 ; JP2.7@66.548,90.793 ccw(c66.548,91.684) 67.178,91.054 ; JP2.7@66.548,90.793 ccw(c66.548,91.684) 67.178,91.054 ; JP2.7@66.548,91.047 ccw(c66.548,92.551) 67.612,91.488 ; JP2.7@66.548,91.047 ccw(c66.548,92.551) 67.612,91.488 ; JP2.7@66.548,91.047 ccw(c66.548,92.551) 67.612,91.488 ; JP2.7@66.917,90.424 cw(c67.808,90.424) 67.178,91.054 ; JP2.7@66.917,90.424 cw(c67.808,90.424) 67.178,91.054 ; JP2.7@66.917,90.424 cw(c67.808,90.424) 67.178,91.054 ; JP2.7@67.171,90.424 cw(c68.675,90.424) 67.612,91.488 ; JP2.7@67.171,90.424 cw(c68.675,90.424) 67.612,91.488 ; JP2.7@67.171,90.424 cw(c68.675,90.424) 67.612,91.488 ; 73.533,93.091 cw(c73.77,92.854) U3.2@73.91,93.159 ; 73.533,93.091 ccw(c73.296,93.328) U3.2@73.601,93.468 ; 73.533,93.091 cw(c73.77,92.854) U3.2@73.91,93.159 ; 73.533,93.091 ccw(c73.296,93.328) U3.2@73.601,93.468 ; 73.533,93.091 cw(c73.77,92.854) U3.2@73.91,93.159 ; 73.533,93.091 ccw(c73.296,93.328) U3.2@73.601,93.468
NetJP2_8: JP2.8 U3.1 | length 31.6
  Bottom Layer w0.254: JP2.8@66.548,92.964 69.85,96.266 U3.1@74.168,96.266 ; JP2.8@66.548,93.333 ccw(c66.548,94.224) 67.178,93.594 ; JP2.8@66.548,93.333 ccw(c66.548,94.224) 67.178,93.594 ; JP2.8@66.548,93.333 ccw(c66.548,94.224) 67.178,93.594 ; JP2.8@66.548,93.587 ccw(c66.548,95.091) 67.612,94.028 ; JP2.8@66.548,93.587 ccw(c66.548,95.091) 67.612,94.028 ; JP2.8@66.548,93.587 ccw(c66.548,95.091) 67.612,94.028 ; JP2.8@66.917,92.964 cw(c67.808,92.964) 67.178,93.594 ; JP2.8@66.917,92.964 cw(c67.808,92.964) 67.178,93.594 ; JP2.8@66.917,92.964 cw(c67.808,92.964) 67.178,93.594 ; JP2.8@67.171,92.964 cw(c68.675,92.964) 67.612,94.028 ; JP2.8@67.171,92.964 cw(c68.675,92.964) 67.612,94.028 ; JP2.8@67.171,92.964 cw(c68.675,92.964) 67.612,94.028 ; 72.664,96.266 cw(c72.664,94.762) U3.1@73.727,95.825 ; 72.664,96.266 ccw(c72.664,97.77) U3.1@73.727,96.707 ; 72.664,96.266 cw(c72.664,94.762) U3.1@73.727,95.825 ; 72.664,96.266 ccw(c72.664,97.77) U3.1@73.727,96.707 ; 72.664,96.266 cw(c72.664,94.762) U3.1@73.727,95.825 ; 72.664,96.266 ccw(c72.664,97.77) U3.1@73.727,96.707 ; 73.277,96.266 cw(c73.277,95.375) U3.1@73.907,96.005 ; 73.277,96.266 ccw(c73.277,97.157) U3.1@73.907,96.527 ; 73.277,96.266 cw(c73.277,95.375) U3.1@73.907,96.005 ; 73.277,96.266 ccw(c73.277,97.157) U3.1@73.907,96.527 ; 73.277,96.266 cw(c73.277,95.375) U3.1@73.907,96.005 ; 73.277,96.266 ccw(c73.277,97.157) U3.1@73.907,96.527
NetJP3_2: JP3.2 U3.23 | length 30.7
  Top Layer w0.254: U3.23@89.408,53.086 90.678,51.816 JP3.2@97.028,51.816 ; U3.23@89.408,52.463 cw(c89.408,50.959) 90.472,52.022 ; U3.23@89.408,52.463 cw(c89.408,50.959) 90.472,52.022 ; U3.23@89.408,52.463 cw(c89.408,50.959) 90.472,52.022 ; U3.23@89.408,52.717 cw(c89.408,51.826) 90.038,52.456 ; U3.23@89.408,52.717 cw(c89.408,51.826) 90.038,52.456 ; U3.23@89.408,52.717 cw(c89.408,51.826) 90.038,52.456 ; U3.23@89.777,53.086 ccw(c90.668,53.086) 90.038,52.456 ; U3.23@89.777,53.086 ccw(c90.668,53.086) 90.038,52.456 ; U3.23@89.777,53.086 ccw(c90.668,53.086) 90.038,52.456 ; U3.23@90.031,53.086 ccw(c91.535,53.086) 90.472,52.022 ; U3.23@90.031,53.086 ccw(c91.535,53.086) 90.472,52.022 ; U3.23@90.031,53.086 ccw(c91.535,53.086) 90.472,52.022 ; 95.524,51.816 cw(c95.524,50.312) JP3.2@96.587,51.375 ; 95.524,51.816 ccw(c95.524,53.32) JP3.2@96.587,52.257 ; 95.524,51.816 cw(c95.524,50.312) JP3.2@96.587,51.375 ; 95.524,51.816 ccw(c95.524,53.32) JP3.2@96.587,52.257 ; 95.524,51.816 cw(c95.524,50.312) JP3.2@96.587,51.375 ; 95.524,51.816 ccw(c95.524,53.32) JP3.2@96.587,52.257 ; 96.137,51.816 cw(c96.137,50.925) JP3.2@96.767,51.555 ; 96.137,51.816 ccw(c96.137,52.707) JP3.2@96.767,52.077 ; 96.137,51.816 cw(c96.137,50.925) JP3.2@96.767,51.555 ; 96.137,51.816 ccw(c96.137,52.707) JP3.2@96.767,52.077 ; 96.137,51.816 cw(c96.137,50.925) JP3.2@96.767,51.555 ; 96.137,51.816 ccw(c96.137,52.707) JP3.2@96.767,52.077
NetJP3_3: JP3.3 U3.24 | length 30.7
  Top Layer w0.254: U3.24@89.408,55.626 90.678,54.356 JP3.3@97.028,54.356 ; U3.24@89.408,55.003 cw(c89.408,53.499) 90.472,54.562 ; U3.24@89.408,55.003 cw(c89.408,53.499) 90.472,54.562 ; U3.24@89.408,55.003 cw(c89.408,53.499) 90.472,54.562 ; U3.24@89.408,55.257 cw(c89.408,54.366) 90.038,54.996 ; U3.24@89.408,55.257 cw(c89.408,54.366) 90.038,54.996 ; U3.24@89.408,55.257 cw(c89.408,54.366) 90.038,54.996 ; U3.24@89.777,55.626 ccw(c90.668,55.626) 90.038,54.996 ; U3.24@89.777,55.626 ccw(c90.668,55.626) 90.038,54.996 ; U3.24@89.777,55.626 ccw(c90.668,55.626) 90.038,54.996 ; U3.24@90.031,55.626 ccw(c91.535,55.626) 90.472,54.562 ; U3.24@90.031,55.626 ccw(c91.535,55.626) 90.472,54.562 ; U3.24@90.031,55.626 ccw(c91.535,55.626) 90.472,54.562 ; 95.524,54.356 cw(c95.524,52.852) JP3.3@96.587,53.915 ; 95.524,54.356 ccw(c95.524,55.86) JP3.3@96.587,54.797 ; 95.524,54.356 cw(c95.524,52.852) JP3.3@96.587,53.915 ; 95.524,54.356 ccw(c95.524,55.86) JP3.3@96.587,54.797 ; 95.524,54.356 cw(c95.524,52.852) JP3.3@96.587,53.915 ; 95.524,54.356 ccw(c95.524,55.86) JP3.3@96.587,54.797 ; 96.137,54.356 cw(c96.137,53.465) JP3.3@96.767,54.095 ; 96.137,54.356 ccw(c96.137,55.247) JP3.3@96.767,54.617 ; 96.137,54.356 cw(c96.137,53.465) JP3.3@96.767,54.095 ; 96.137,54.356 ccw(c96.137,55.247) JP3.3@96.767,54.617 ; 96.137,54.356 cw(c96.137,53.465) JP3.3@96.767,54.095 ; 96.137,54.356 ccw(c96.137,55.247) JP3.3@96.767,54.617
NetJP3_4: JP3.4 U3.25 | length 30.7
  Top Layer w0.254: U3.25@89.408,58.166 90.678,56.896 JP3.4@97.028,56.896 ; U3.25@89.408,57.543 cw(c89.408,56.039) 90.472,57.102 ; U3.25@89.408,57.543 cw(c89.408,56.039) 90.472,57.102 ; U3.25@89.408,57.543 cw(c89.408,56.039) 90.472,57.102 ; U3.25@89.408,57.797 cw(c89.408,56.906) 90.038,57.536 ; U3.25@89.408,57.797 cw(c89.408,56.906) 90.038,57.536 ; U3.25@89.408,57.797 cw(c89.408,56.906) 90.038,57.536 ; U3.25@89.777,58.166 ccw(c90.668,58.166) 90.038,57.536 ; U3.25@89.777,58.166 ccw(c90.668,58.166) 90.038,57.536 ; U3.25@89.777,58.166 ccw(c90.668,58.166) 90.038,57.536 ; U3.25@90.031,58.166 ccw(c91.535,58.166) 90.472,57.102 ; U3.25@90.031,58.166 ccw(c91.535,58.166) 90.472,57.102 ; U3.25@90.031,58.166 ccw(c91.535,58.166) 90.472,57.102 ; 95.524,56.896 cw(c95.524,55.392) JP3.4@96.587,56.455 ; 95.524,56.896 ccw(c95.524,58.4) JP3.4@96.587,57.337 ; 95.524,56.896 cw(c95.524,55.392) JP3.4@96.587,56.455 ; 95.524,56.896 ccw(c95.524,58.4) JP3.4@96.587,57.337 ; 95.524,56.896 cw(c95.524,55.392) JP3.4@96.587,56.455 ; 95.524,56.896 ccw(c95.524,58.4) JP3.4@96.587,57.337 ; 96.137,56.896 cw(c96.137,56.005) JP3.4@96.767,56.635 ; 96.137,56.896 ccw(c96.137,57.787) JP3.4@96.767,57.157 ; 96.137,56.896 cw(c96.137,56.005) JP3.4@96.767,56.635 ; 96.137,56.896 ccw(c96.137,57.787) JP3.4@96.767,57.157 ; 96.137,56.896 cw(c96.137,56.005) JP3.4@96.767,56.635 ; 96.137,56.896 ccw(c96.137,57.787) JP3.4@96.767,57.157
NetJP3_5: JP3.5 U3.26 | length 30.7
  Top Layer w0.254: U3.26@89.408,60.706 90.678,59.436 JP3.5@97.028,59.436 ; U3.26@89.408,60.083 cw(c89.408,58.579) 90.472,59.642 ; U3.26@89.408,60.083 cw(c89.408,58.579) 90.472,59.642 ; U3.26@89.408,60.083 cw(c89.408,58.579) 90.472,59.642 ; U3.26@89.408,60.337 cw(c89.408,59.446) 90.038,60.076 ; U3.26@89.408,60.337 cw(c89.408,59.446) 90.038,60.076 ; U3.26@89.408,60.337 cw(c89.408,59.446) 90.038,60.076 ; U3.26@89.777,60.706 ccw(c90.668,60.706) 90.038,60.076 ; U3.26@89.777,60.706 ccw(c90.668,60.706) 90.038,60.076 ; U3.26@89.777,60.706 ccw(c90.668,60.706) 90.038,60.076 ; U3.26@90.031,60.706 ccw(c91.535,60.706) 90.472,59.642 ; U3.26@90.031,60.706 ccw(c91.535,60.706) 90.472,59.642 ; U3.26@90.031,60.706 ccw(c91.535,60.706) 90.472,59.642 ; 95.524,59.436 cw(c95.524,57.932) JP3.5@96.587,58.995 ; 95.524,59.436 ccw(c95.524,60.94) JP3.5@96.587,59.877 ; 95.524,59.436 cw(c95.524,57.932) JP3.5@96.587,58.995 ; 95.524,59.436 ccw(c95.524,60.94) JP3.5@96.587,59.877 ; 95.524,59.436 cw(c95.524,57.932) JP3.5@96.587,58.995 ; 95.524,59.436 ccw(c95.524,60.94) JP3.5@96.587,59.877 ; 96.137,59.436 cw(c96.137,58.545) JP3.5@96.767,59.175 ; 96.137,59.436 ccw(c96.137,60.327) JP3.5@96.767,59.697 ; 96.137,59.436 cw(c96.137,58.545) JP3.5@96.767,59.175 ; 96.137,59.436 ccw(c96.137,60.327) JP3.5@96.767,59.697 ; 96.137,59.436 cw(c96.137,58.545) JP3.5@96.767,59.175 ; 96.137,59.436 ccw(c96.137,60.327) JP3.5@96.767,59.697